# Altium PCB JTAG.PcbDoc
Units mil, origin at the board's own origin, x right, y up, seen from the top; angles counter-clockwise.
Board outline 545 x 1070 mil, 2 copper layers (Top Layer, Bottom Layer); 2 components, 6 nets, 26 pads, 0 vias.
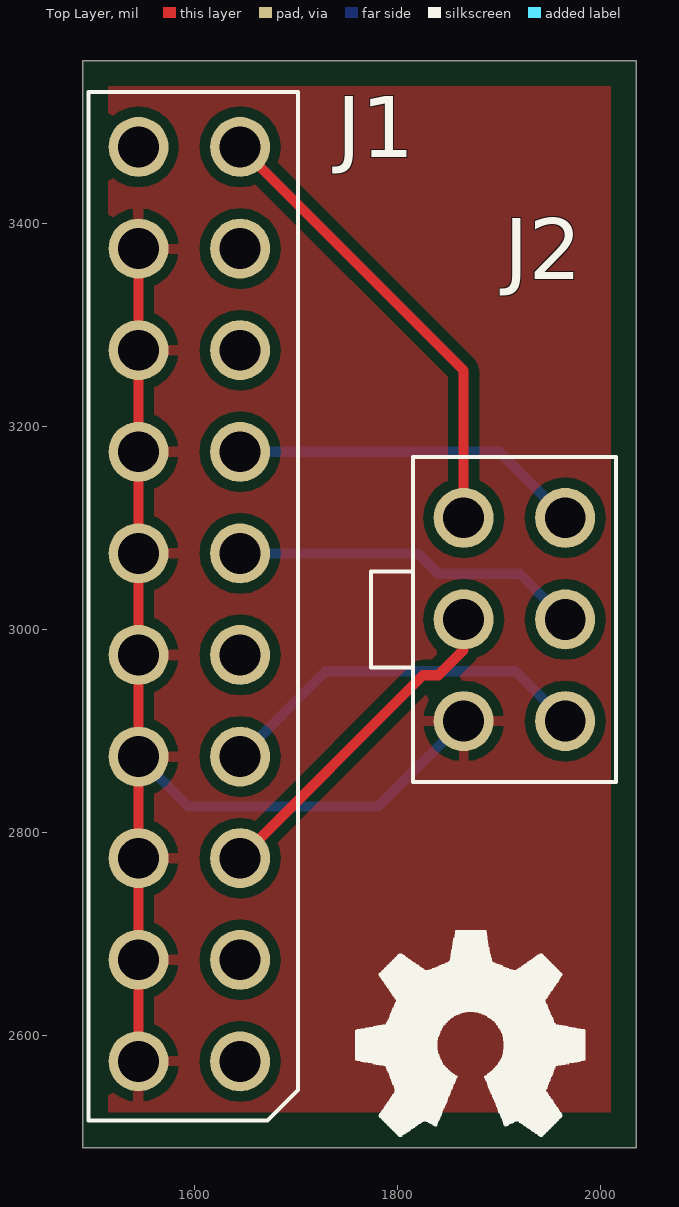
[diagram p0: Top Layer view]
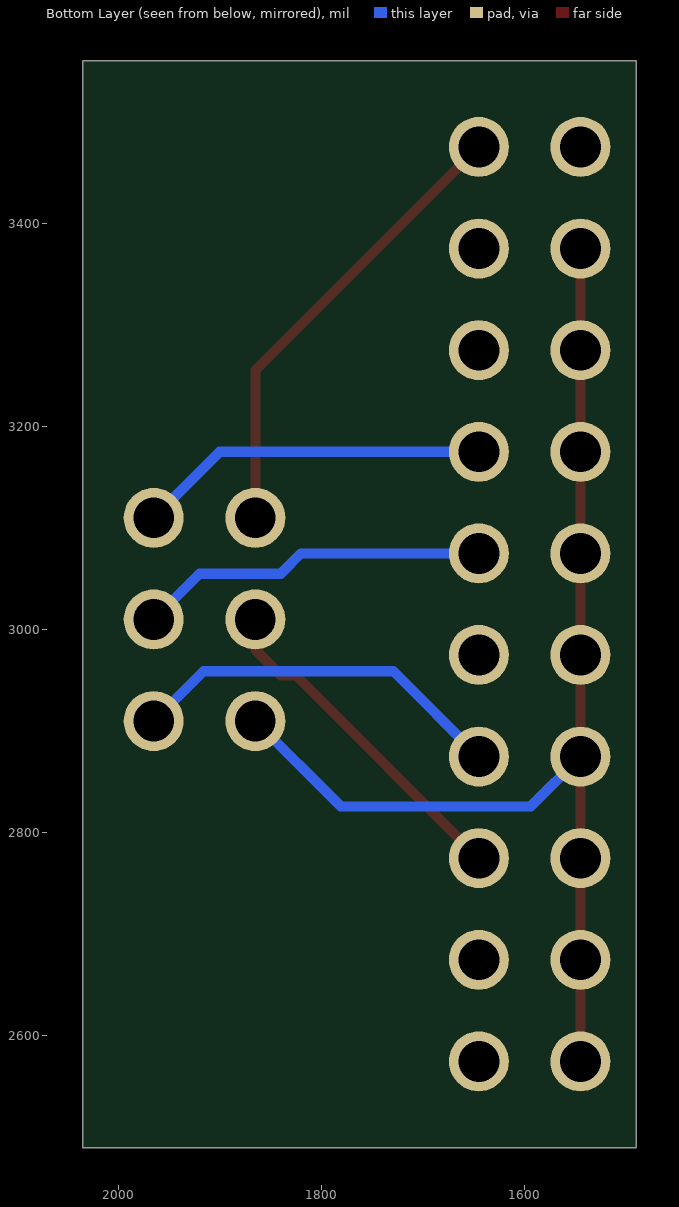
[diagram p1: Bottom Layer view, seen from below]

## Layer stack, top to bottom
Top Solder: solder mask 0.4, Solder Resist, Dk 3.5
Top Layer: signal copper 1.4
Dielectric 1: dielectric 12.6, FR-4, Dk 4.8
Bottom Layer: signal copper 1.4
Bottom Solder: solder mask 0.4, Solder Resist, Dk 3.5

## Board outline
1490,2490 1490,3560 2035,3560 2035,2490

## Design rules (kind name [scope] priority, off if disabled: settings)
Clearance [All] p1: gap=10 ignorepadtopadclearanceinfootprint=FALSE except(0: Arc-Hole Track-Hole SMDPad-Hole THPad-Hole Via-Hole Fill-Hole Poly-Hole Region-Hole Text-Hole)
PolygonConnect [All] p1: connectstyle=Relief reliefconductorwidth=10 reliefentries=4 polygonreliefangle="90 Angle" airgapwidth=10
RoomDefinition JTAG [InComponentClass('JTAG')] p1: confinementstyle=ConfineIn formatcopy=TRUE lockcomponents=FALSE outline 0,0 2000,0 2000,1000 0,1000
RoutingVias [All] p1: holewidth=28 width=50 viastyle="Through Hole" minholewidth=28 minwidth=50 maxholewidth=28 maxwidth=50
SolderMaskExpansion [All] p1: expansion=4
Width [All] p1: maxlimit=10 minlimit=10 preferedwidth=10
30 further rules are at their usual default settings.

## Components (designator, comment, footprint, x,y, rotation, side; value= is the part's Value field where it differs from the comment)
J1 "SFH11-PBPC-D10-RA-BK" SFH11-PBPC-D10-RA-BK 1595,3025 r90 top
J2 "30306-6002HB" 30306-6002HB 1915,3010 r270 top

## Footprints (in the part's own frame and the unit in brackets; to place one, negate y for a bottom-side part, rotate by r counter-clockwise, add the part's x,y. Pads: shape width x height; smd on the part's side, far side on the other; paste and mask are expansions set on the pad)
30306-6002HB [mm]
  round 1.5 hole 1.02: 1(-2.54,-1.27) 2(-2.54,1.27) 3(0,-1.27) 4(0,1.27) 5(2.54,-1.27) 6(2.54,1.27)
  silkscreen extent -4.06,-3.58 4.06,2.54, body extent -7.61,-4.24 7.61,4.57, height 8.89
SFH11-PBPC-D10-RA-BK [mm] "CONN HEADR FMALE 20PS .1\" R/A AU"
  round 1.5 hole 1.02: 1(-11.43,-1.27) 2(-11.43,1.27) 3(-8.89,-1.27) 4(-8.89,1.27) 5(-6.35,-1.27) 6(-6.35,1.27) 7(-3.81,-1.27) 8(-3.81,1.27) 9(-1.27,-1.27) 10(-1.27,1.27) 11(1.27,-1.27) 12(1.27,1.27) 13(3.81,-1.27) 14(3.81,1.27) 15(6.35,-1.27) 16(6.35,1.27) 17(8.89,-1.27) 18(8.89,1.27) 19(11.43,-1.27) 20(11.43,1.27)
  silkscreen extent -12.9,-2.72 12.8,2.51, body extent -15.16,-1.49 15.32,11.35, height 5.75

## Part data
J1: "20 Position Header Connector 0.100\" (2.54mm) Through Hole, Right Angle Gold", Manufacturer="Sullins Connector Solutions", Manufacturer Part Number=SFH11-PBPC-D10-RA-BK
J2: "6 Positions Header Connector 0.100\" (2.54mm) Through Hole Gold", Manufacturer=3M, Manufacturer Part Number=30306-6002HB

## Nets (pads, with @x,y where several pads share a name; then routed paths per layer and width w, separated by ;. In a path a pad name is that pad's centre, name@x,y a point inside that pad or via, vN(x,y) a via of type N, cw(c..) or ccw(c..) an arc to the next point about the centre after c; other vN are vias at no path point)
GND: J1.2 J1.4 J1.6 J1.8 J1.10 J1.12 J1.14 J1.16 J1.18 J2.5 | length 1175.1
  Top Layer w10: J1.2 J1.4 J1.6 J1.8 J1.10 J1.12 J1.14 J1.16 J1.18
  Bottom Layer w10: J1.8 1594,2826 1781,2826 J2.5
nRESET: J1.5 J2.3 | length 334.9
  Top Layer w10: J1.5 1825,2955 1840,2955 1865,2980 J2.3
SWCLK: J1.11 J2.4 | length 346.9
  Bottom Layer w10: J1.11 1820,3075 1840,3055 1920,3055 J2.4
SWDIO: J1.13 J2.2 | length 346.9
  Bottom Layer w10: J1.13 1900,3175 J2.2
SWO: J1.7 J2.6 | length 375.1
  Bottom Layer w10: J1.7 1729,2959 1916,2959 J2.6
VCC: J1.19 J2.1 | length 456.1
  Top Layer w10: J1.19 1865,3255 J2.1
pads on no net: J1.1 J1.3 J1.9 J1.15 J1.17 J1.20

## Polygon pours and split planes (outlines as drawn)
GND on Top Layer "GND_L01_P000" (solid, pour order 0): 1515,3535 2010,3535 2010,2525 1515,2525

## Silkscreen, mask and mechanical layers (free items; w line width, h text height)
Top Overlay:
  region: 1925 vertices and 0 holes, not listed, extent 1758.39,2500.82 1984.73,2704.11
Mechanical 1:
  the board outline again, w3.94